# Altium PCB AS01-SPIPX-V3.0.pcbdoc
Units mm, origin at the board's own origin, x right, y up, seen from the top; angles counter-clockwise.
Board outline 46.1 x 40.64 mm, 2 copper layers (Top Layer, Bottom Layer); 1 components, 12 nets, 18 pads, 0 vias.
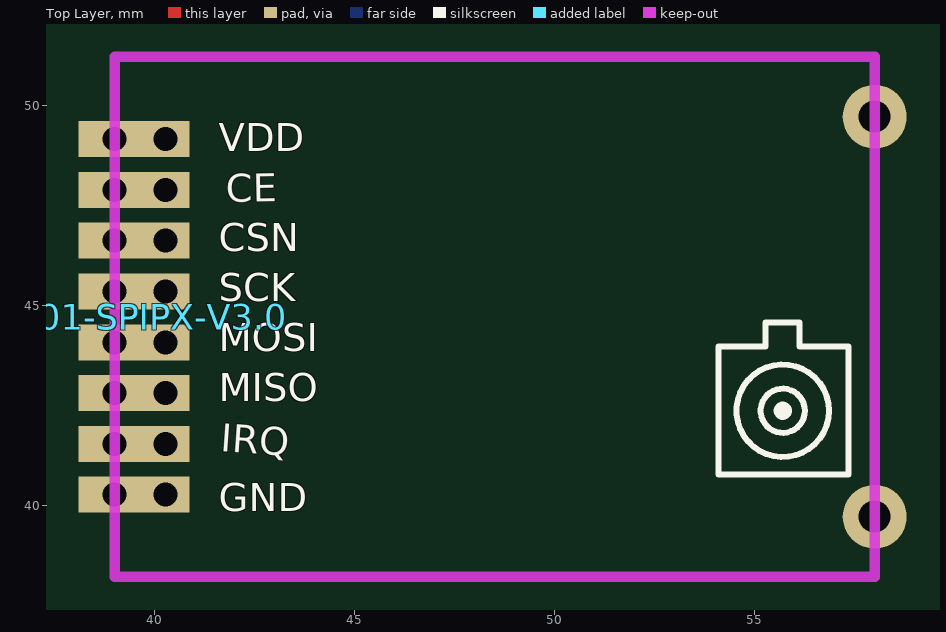
[diagram p0: Top Layer view]
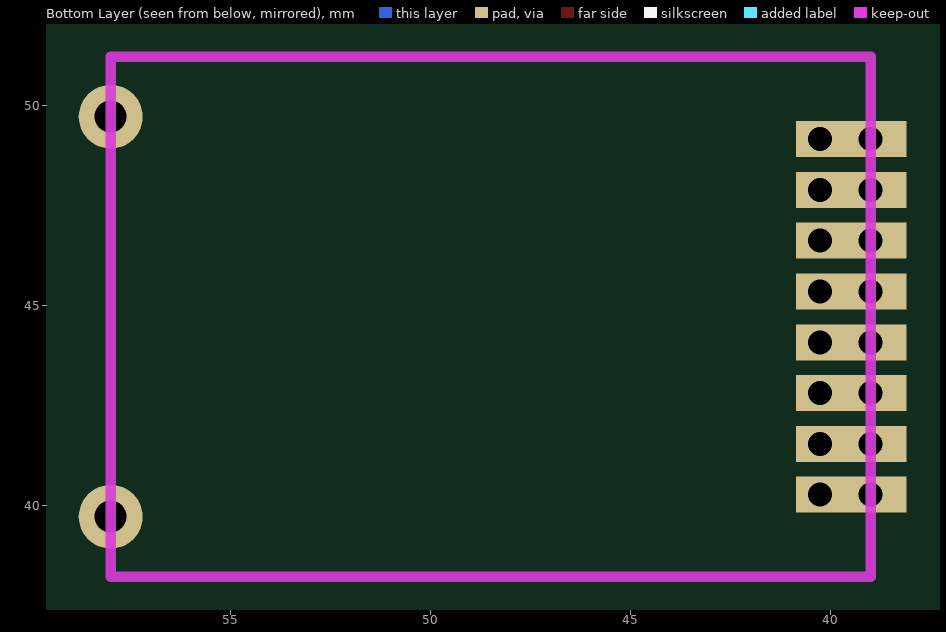
[diagram p1: Bottom Layer view, seen from below]

## Layer stack, top to bottom
Top Layer: signal copper (thickness not stored)
Dielectric: dielectric 0.32, FR-4, Dk 4.8
Bottom Layer: signal copper (thickness not stored)

## Board outline
71.5,25.4 25.4,25.4 25.4,66.037 71.5,66.037

## Components (designator, comment, footprint, x,y, rotation, side; value= is the part's Value field where it differs from the comment)
AS01-SPIPX-V3.0 "CON8-2X1.27MM" CON8-2X1.27MM 39,49.167 r0 top

## Footprints (in the part's own frame and the unit in brackets; to place one, negate y for a bottom-side part, rotate by r counter-clockwise, add the part's x,y. Pads: shape width x height; smd on the part's side, far side on the other; paste and mask are expansions set on the pad)
CON8-2X1.27MM [mm]
  rect 1.8x0.9 hole 0.6: 1(0,0) 2(0,-1.27) 3(0,-2.54) 4(0,-3.81) 5(0,-5.08) 6(0,-6.35) 7(0,-7.62) 8(0,-8.89)
  rect 1.2x0.9 hole 0.6: 1(1.27,0) 2(1.27,-1.27) 3(1.27,-2.54) 4(1.27,-3.81) 5(1.27,-5.08) 6(1.27,-6.35) 7(1.27,-7.62) 8(1.27,-8.89)

## Free pads (board coordinates)
  round 1.6 hole 0.8: 0(58,39.727) 0(58,49.727)

## Nets (pads, with @x,y where several pads share a name; then routed paths per layer and width w, separated by ;. In a path a pad name is that pad's centre, name@x,y a point inside that pad or via, vN(x,y) a via of type N, cw(c..) or ccw(c..) an arc to the next point about the centre after c; other vN are vias at no path point)
S$50: 
S$52: 
S$56: 
S$58: 
S$2131: 
S$2133: 
S$2135: 
S$2146: 
S$2148: 
S$2150: 
S$2152: 
S$2154: 
pads on no net: AS01-SPIPX-V3.0.1 AS01-SPIPX-V3.0.2 AS01-SPIPX-V3.0.3 AS01-SPIPX-V3.0.4 AS01-SPIPX-V3.0.5 AS01-SPIPX-V3.0.6 AS01-SPIPX-V3.0.7 AS01-SPIPX-V3.0.8

## Silkscreen, mask and mechanical layers (free items; w line width, h text height)
Top Overlay:
  circle w0.15: c55.7,42.377 r0.552
  circle w0.15: c55.7,42.377 r1.157
  circle w0.254: c55.7,42.377 r0.1
  lines w0.15 net S$2131: 57.35,40.777 57.35,43.977
  lines w0.15 net S$2133: 54.1,40.777 57.3,40.777
  lines w0.15 net S$2135: 54.1,40.777 54.1,43.977
  lines w0.15 net S$2146: 56.125,43.977 57.3,43.977
  lines w0.15 net S$2148: 54.1,43.977 55.275,43.977
  lines w0.15 net S$2150: 55.275,43.977 55.275,44.577
  lines w0.15 net S$2152: 56.125,43.977 56.125,44.577
  lines w0.15 net S$2154: 55.275,44.577 56.1,44.577
  text "VDD" at 41.6,48.627 h1.2
  text "CE" at 41.789,47.358 h1.2 r1
  text "CSN" at 41.6,46.131 h1.2
  text "SCK" at 41.6,44.879 h1.2
  text "MOSI" at 41.6,43.628 h1.2
  text "MISO" at 41.6,42.376 h1.2
  text "IRQ" at 41.609,41.124 h1.2 r356
  text "GND" at 41.6,39.627 h1.2
Document:
  lines w0.003: 48.425,45.693 48.475,45.744